# Altium PCB GPSDO_V2.0.PcbDoc (part 1 of 3)
Units mil, origin at the board's own origin, x right, y up, seen from the top; angles counter-clockwise.
Board outline 3461 x 3930 mil, 2 copper layers (Top Layer, Bottom Layer); 97 components, 56 nets, 415 pads, 225 vias.
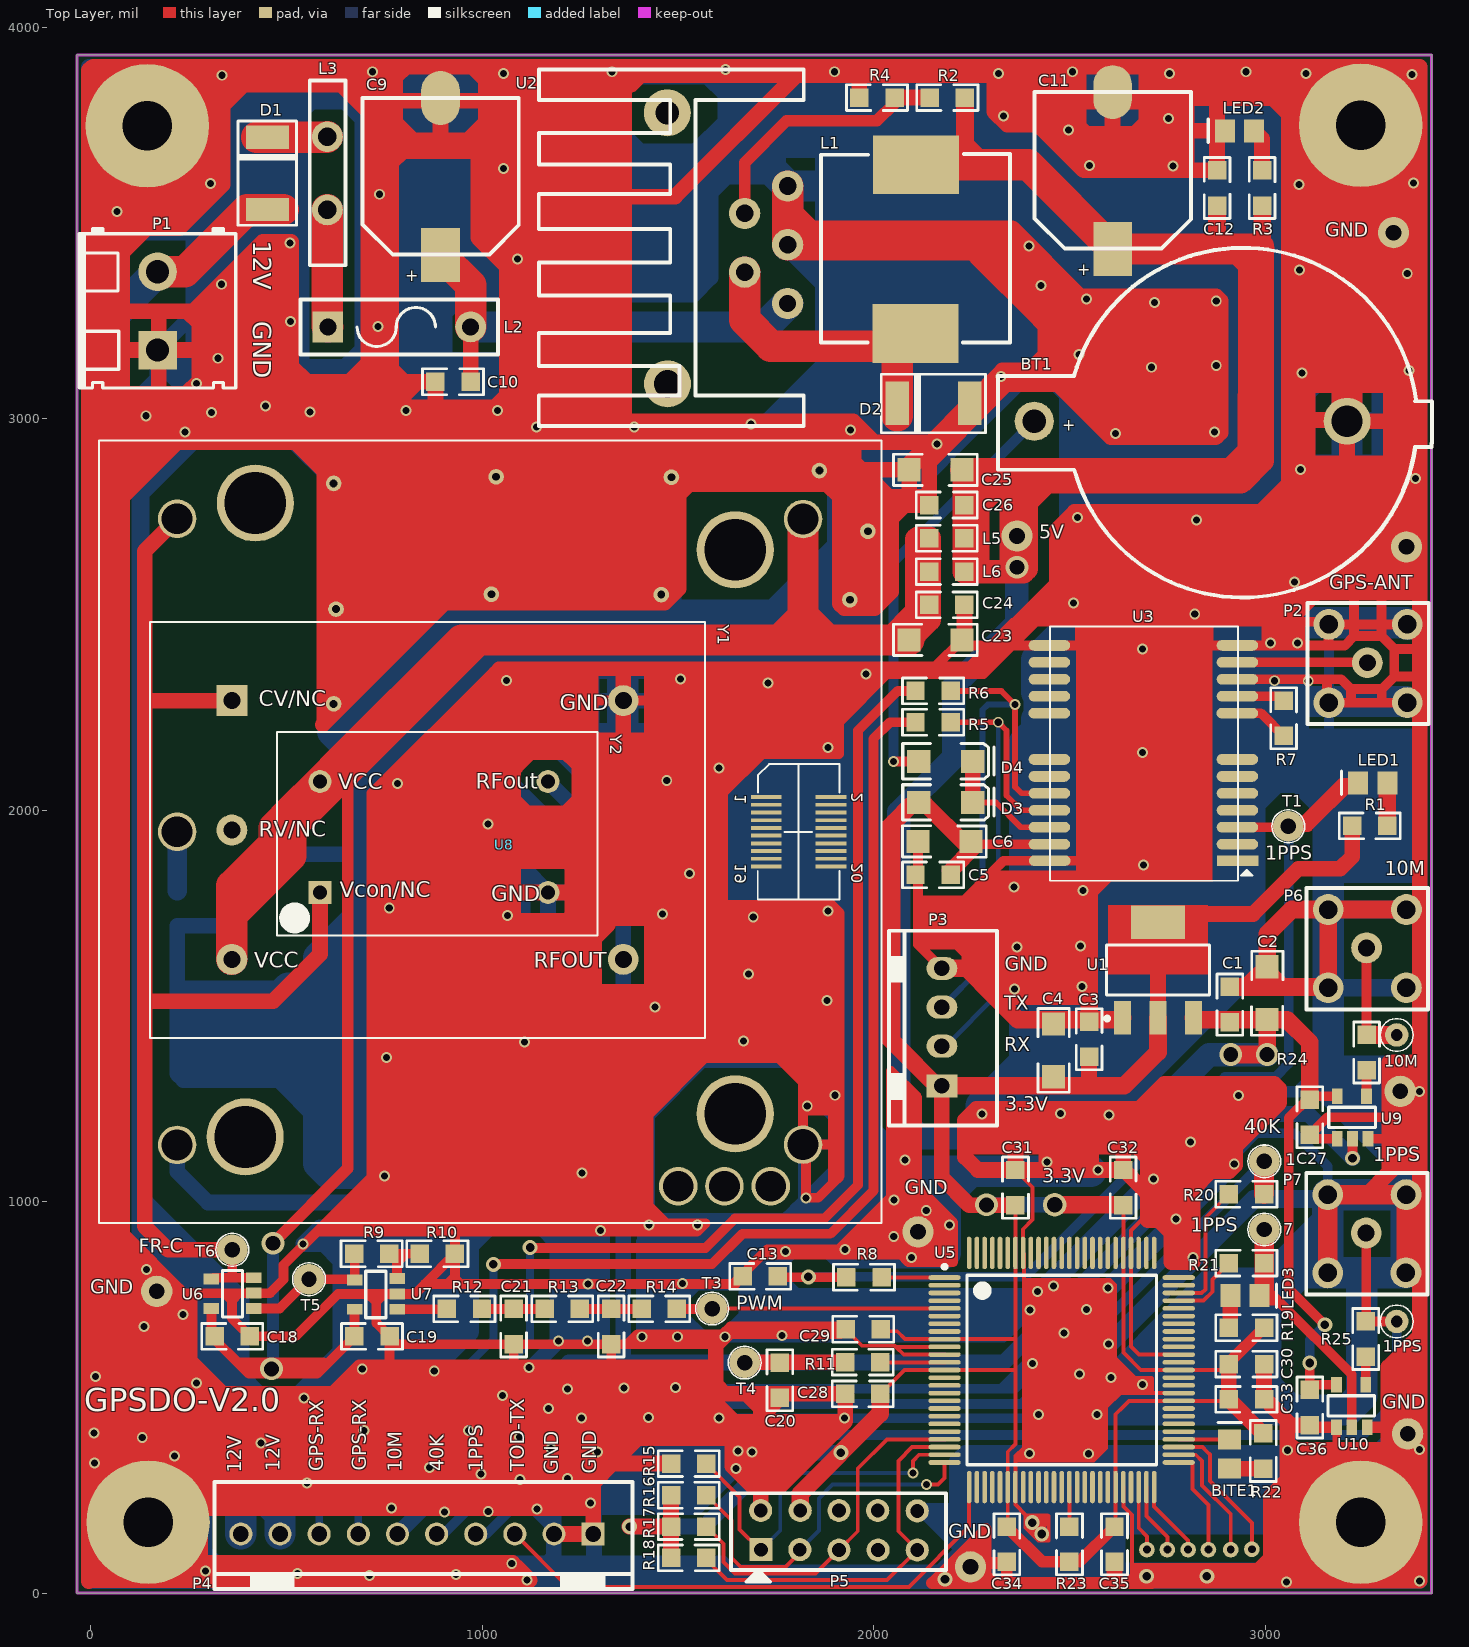
[diagram p0: Top Layer view]
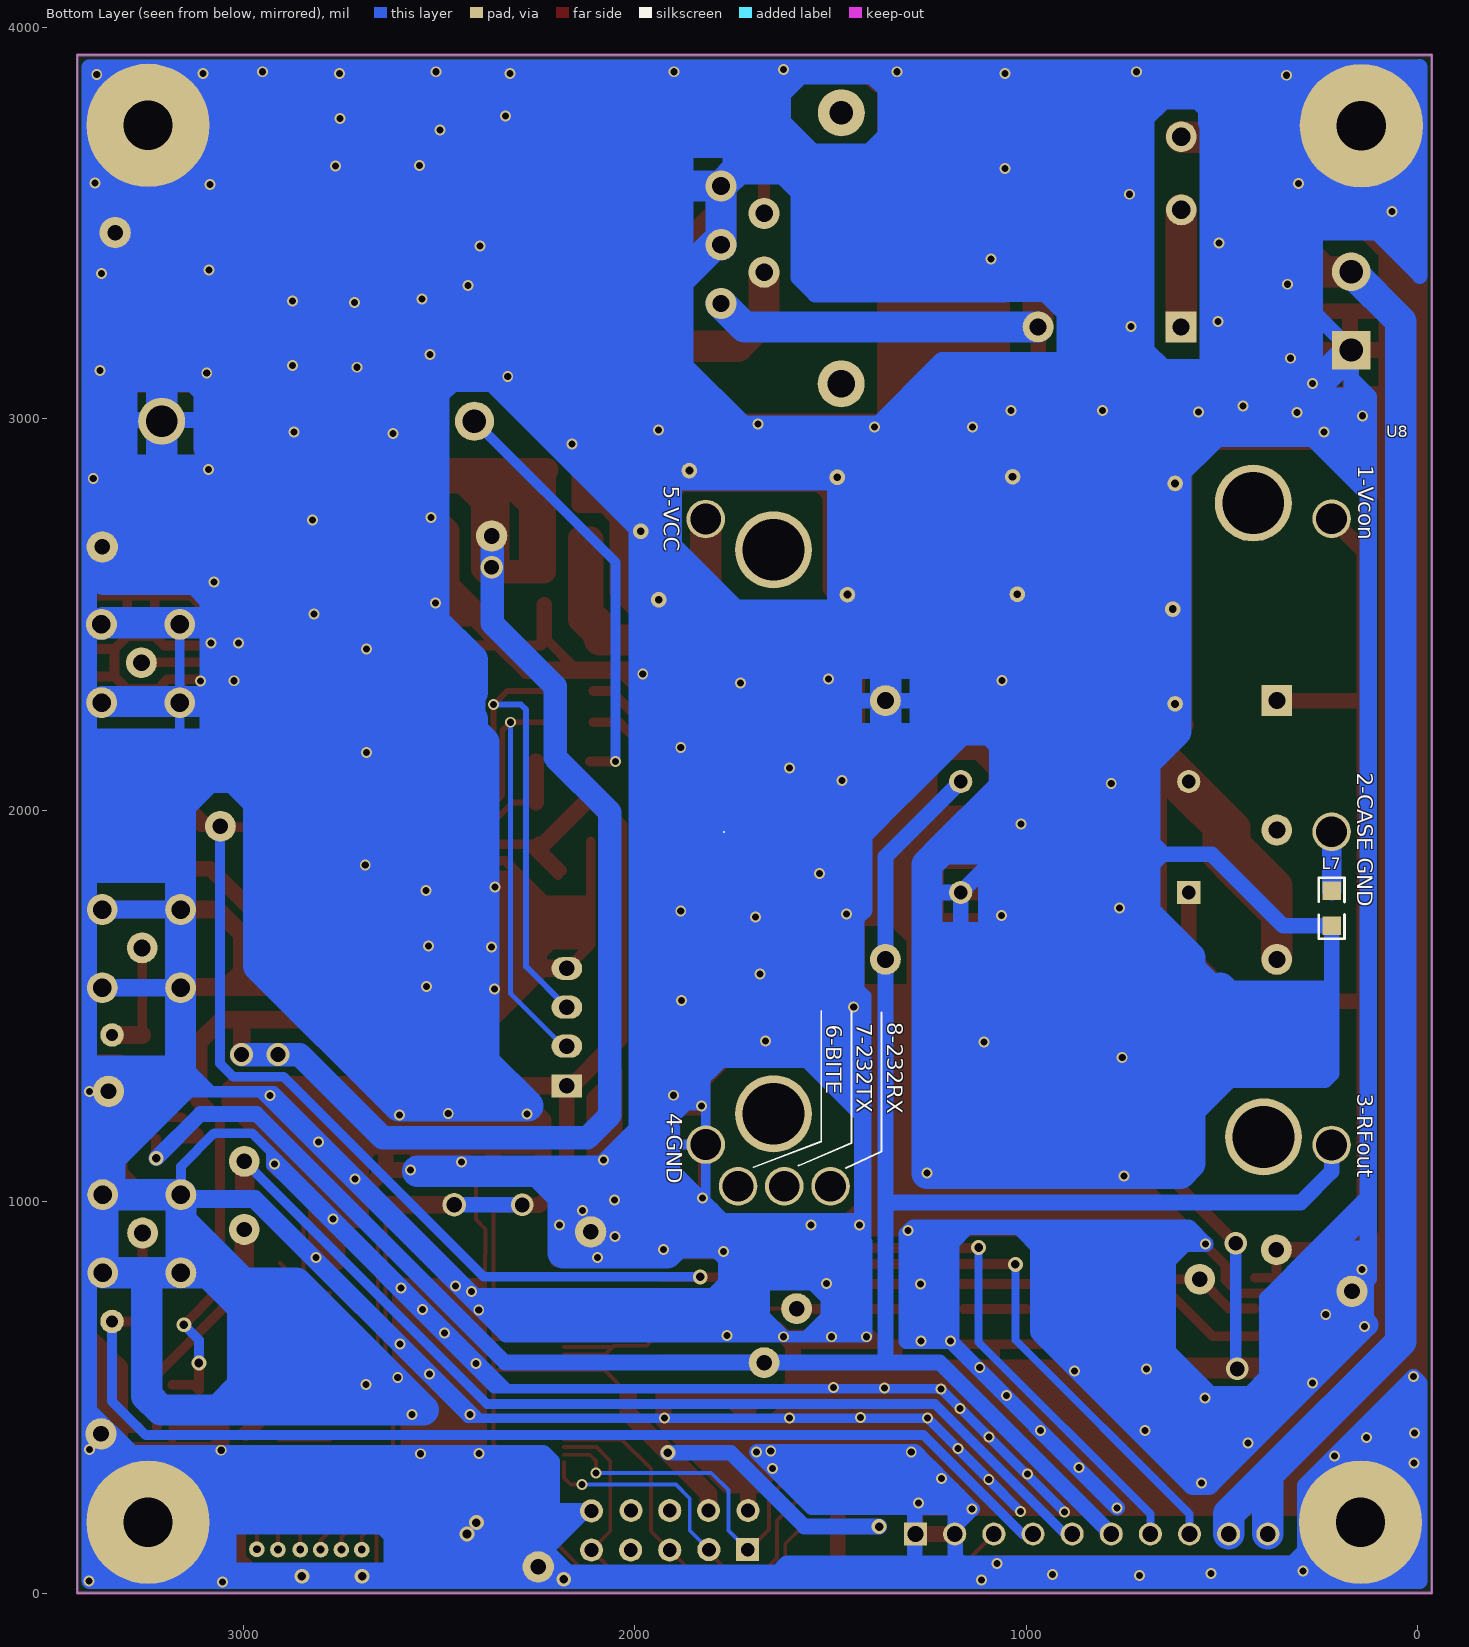
[diagram p1: Bottom Layer view, seen from below]

## Layer stack, top to bottom
Top Solder: solder mask 0.4, Solder Resist, Dk 3.5
Top Layer: signal copper 1.4
Dielectric 1: dielectric 12.6, FR-4, Dk 4.8
Bottom Layer: signal copper 1.4
Bottom Solder: solder mask 0.4, Solder Resist, Dk 3.5

## Board outline
-36,3930 3425,3930 3425,0 -36,0

## Design rules (kind name [scope] priority, off if disabled: settings)
Clearance [All] p1: gap=7
ComponentClearance [All] p1 off: gap=10 collisioncheckmode=3 verticalgap=10 showdistances=FALSE
PolygonConnect [All] p1: connectstyle=Relief reliefconductorwidth=10 reliefentries=4 polygonreliefangle="90 Angle" airgapwidth=10
RoutingVias [All] p1: holewidth=28 width=50 viastyle="Through Hole" minholewidth=28 minwidth=50 maxholewidth=28 maxwidth=50
SilkToBoardRegionClearance [All] p1 off:
SilkToSilkClearance [All] p1 off: silktosilkclearance=10
SilkToSolderMaskClearance [IsPad] p1 off: minsilkscreentomaskgap=10 clearancetoexposedcopper=TRUE
SolderMaskExpansion [All] p1: expansion=4
Width [All] p1: maxlimit=100 minlimit=10 preferedwidth=10 minimp=50.000000 maximp=50.000000 favimp=50.000000
26 further rules are at their usual default settings.

## Components (designator, comment, footprint, x,y, rotation, side; value= is the part's Value field where it differs from the comment)
1 "TEST" 测试点（圆形）#1 2998,1103 r90 top
1PPS "TEST" 测试点（圆形）#2 3336,694 r0 top
7 "TEST" 测试点（圆形）#1 2998,929 r90 top
10M "TEST" 测试点（圆形）#2 3336,1426 r0 top
BITE1 "红色" LED0805 2909,318 r90 top
BT1 "电池座 小" "电池座 2032  直插" 2410,2995 r90 top locked
C1 "0.1uF" 0805 2910,1548.6 r270 top
C2 "10uF" 1206 3005,1600 r270 top
C3 "0.1uF" 0805 2550,1460 r270 top
C4 "10uF" 1206 2459,1454 r270 top
C5 "0.1uF" 0805 2106.56,1835 r0 top
C6 "10uF" 1206 2113.16,1920 r0 top
C9 "470u/35v" "电容 铝电解 470U/35V" 893,3420 r0 top
C10 "0.1uF/50v" 0805 880,3095 r0 top
C11 "470u/35v" "电容 铝电解 470U/35V" 2610,3435 r0 top
C12 "104" 0805 2877,3545 r90 top
C13 "10pF" 0805 1665,809 r0 top
C18 "0.1uF" 0805 316,656 r0 top
C19 "0.1uF" 0805 673,656 r0 top
C20 "20pF" 0805 1760,589 r270 top
C21 "0.1uF" 0805 1080,636 r90 top
C22 "0.1uF" 0805 1329,636 r90 top
C23 "100u/25V" 1206 2090.19,2435 r0 top
C24 "0.1uF" 0805 2231.6,2525 r180 top
C25 "100u/25V" 1206 2225,2870 r180 top
C26 "0.1uF" 0805 2141.6,2780 r0 top
C27 "0.1uF" 0805 3114,1261 r270 top
C28 "0.1uF" 0805 1927,509 r0 top
C29 "0.1uF" 0805 1928,674 r0 top
C30 "0.1uF" 0805 2997,585 r180 top
C31 "0.1uF" 0805 2362,1081 r270 top
C32 "0.1uF" 0805 2637,1081 r270 top
C33 "0.1uF" 0805 2997,495 r180 top
C34 "0.1uF" 0805 2340,80 r90 top
C35 "0.1uF" 0805 2615,80 r90 top
C36 "0.1uF" 0805 3114,519 r270 top
D1 "1N5822" "二极管 贴片 4007" 451,3535 r90 top
D2 "1N5822" "二极管 贴片 4007" 2245,3040 r180 top
D3 "1N5819" "二极管 贴片 IN4148" 2115,2020 r0 top
D4 "1N5819" "二极管 贴片 IN4148" 2115,2125 r0 top
L1 "100uH/3A" "电感 贴片 12*12" 2108,3220 r90 top
L2 "磁珠" "磁珠 直插" 605,3235 r0 top
L3 "30V  3A" "30V/4A 自恢复保险" 565,3865 r270 top
L5 "磁珠" 0805 2141.6,2695 r0 top
L6 "磁珠" 0805 2141.6,2610 r0 top
L7 "磁珠" 0805 220,1705 r90 bottom
LED1 "绿色" LED0805 3312,2070 r180 top
LED2 "红色" Led0805 2972,3736 r180 top
LED3 "红色" LED0805 2911,760 r0 top
P1 "HT5.08-2" KF128L-5.08-2P 170,3376 r270 top
P2 "SMA" "天线座 50ohm 直立" 3261,2377 r0 top
P3 "XH2.54-4" VH2.54_4 2174,1296 r270 top
P4 "XH2.54-10" VH2.54_10 1283,151 r0 top
P5 "DC3压线座" "双排插针 2.54 2*5" 1711,111 r90 top
P6 "SMA" "天线座 50ohm 直立" 3259,1648.5 r0 top
P7 "SMA" "天线座 50ohm 直立" 3258,920 r0 top
R1 "1K" 0805 3222,1960 r0 top
R2 "30k" 0805 2143,3821 r0 top
R3 "2K" 0805 2992,3545 r90 top
R4 "10K" 0805 1963,3821 r0 top
R5 "0" 0805 2106.56,2225 r0 top
R6 "0" 0805 2106.56,2305 r0 top
R7 "0" 0805 3047,2190 r90 top
R8 "10R" 0805 2020,807 r180 top
R9 "510" 0805 762,867 r180 top
R10 "1k" 0805 930,867 r180 top
R11 "10R" 0805 2017,590 r180 top
R12 "510" 0805 999,726 r180 top
R13 "10k" 0805 1249,726 r180 top
R14 "10k" 0805 1497,726 r180 top
R15 "1k" 0805 1482,331 r0 top
R16 "10k" 0805 1572,250 r180 top
R17 "10k" 0805 1572,170 r180 top
R18 "10k" 0805 1572,90 r180 top
R19 "1k" 0805 2997,678 r180 top
R20 "10" 0805 2997,1019 r180 top
R21 "10" 0805 2997,843 r180 top
R22 "1k" 0805 2995,318 r90 top
R23 "10K" 0805 2500,170 r270 top
R24 "49.9" 0805 3259,1336 r90 top
R25 "49.9" 0805 3257,604 r90 top
T1 "TEST" 测试点（圆形）#1 3059,1959 r0 top
T3 "TEST" 测试点（圆形）#1 1587,727 r0 top
T4 "TEST" 测试点（圆形）#1 1670,589 r0 top
T5 "TEST" 测试点（圆形）#1 557,802 r0 top
T6 "TEST" 测试点（圆形）#1 361,877 r0 top
U1 "SPX1117M3-3.3" SOT223 2635,1470 r0 top
U2 "LM2576T-ADJ" "TO220 LM2576-YA30" 1780,3295 r90 top
U3 "N303-3" "模块 N303-3" 2930,1820 r90 top
U5 "EPM240T100C5N" TQFP100 2480,570 r0 top
U6 "LMV321" SOT23-5 416,727 r180 top
U7 "LMV321" SOT23-5 782,725 r180 top
U8 "SA.53m(国产铷钟HXTF1031H)" "模块 SA.53m" 2020,2945 r270 bottom
U9 "NC7SZ125" SOT23-5 3184,1161 r90 top
U10 "NC7SZ125" SOT23-5 3182,424 r90 top
Y1 "VCOCXO36-5V-10M" "模块 VCOCXO36-12V-10M" 360,2300 r0 top
Y2 "VCTCXO-5V-10M" "模块 VCTCXO-5V-10M" 585,1790 r0 top

## Footprints (in the part's own frame and the unit in brackets; to place one, negate y for a bottom-side part, rotate by r counter-clockwise, add the part's x,y. Pads: shape width x height; smd on the part's side, far side on the other; paste and mask are expansions set on the pad)
"30V/4A 自恢复保险" [mm] "Resistor; 2 Leads"
  round 2 hole 1.2: 1(3.658,0.991) 2(8.407,0.991)
  silkscreen extent 0,-0.15 12,2.16
0805 [mm]
  rect 1.2x1.2 smd: 1(0,0) 2(2.286,0)
  silkscreen extent -0.84,-0.84 3.12,0.84
1206 [mm]
  rect 1.5x1.5 smd: 1(-0.005,0) 2(3.424,0)
  silkscreen extent -1.01,-1.01 4.43,1.02
KF128L-5.08-2P [mm]
  rect 2.5x2.5 hole 1.5: 1(5.08,0)
  round 2.5 hole 1.5: 2(0,0)
  silkscreen extent -2.79,-5.08 7.54,5.08
LED0805 [mm] "Chip Capacitor; Body 2.0 x 1.2 mm (LxW typ)"
  rect 1.3x1.5 smd: 1(0,0) 2(1.9,0)
  silkscreen extent 2.98,-0.76 2.98,0.76
Led0805 [mm] "Chip Capacitor; Body 2.0 x 1.2 mm (LxW typ)"
  rect 1.3x1.5 smd: 1(0,0) 2(1.9,0)
  silkscreen extent 2.98,-0.76 2.98,0.76
SOT23-5 [mm]
  rect 1x0.7 smd: 1(0,0) 2(-0.002,-1) 3(-0.001,-2) 4(2.753,-1.91) 5(2.754,0)
  silkscreen extent 0.73,-2.48 2.04,0.55
SOT223 [mm] "SOT-223/SC-73; 4 Leads; Body 6.7 x 7.3 mm, inc. leads (LxW max)"
  rect 1.1x2.15 smd: 1(0.011,-0.001) 2(2.311,-0.001) 3(4.611,-0.001)
  rect 3.5x2.15 smd: 4(2.311,6.199)
  silkscreen extent -1.11,-0.18 5.66,4.72
"TO220 LM2576-YA30" [mil]
  round 80 hole 43.31: 1(0,0)
  round 80 hole 45: 2(80.01,109.98) 3(150.01,-0.02) 4(230.01,109.98) 5(300.01,-0.02)
  round 120 hole 70: ""(-205.51,306.97)
  round 120 hole 60: ""(487.02,307.5)
  silkscreen extent -314,-41 598,636
TQFP100 [mm] "Thin QFP, 100-Leads, Body 14x14mm, Pitch 0.5mm, IPC Low Density"
  oval 2.1x0.3 smd: 1(-7.6,6) 2(-7.6,5.5) 3(-7.6,5) 4(-7.6,4.5) 5(-7.6,4) 6(-7.6,3.5) 7(-7.6,3) 8(-7.6,2.5) 9(-7.6,2) 10(-7.6,1.5) 11(-7.6,1) 12(-7.6,0.5) 13(-7.6,0) 14(-7.6,-0.5) 15(-7.6,-1) 16(-7.6,-1.5) 17(-7.6,-2) 18(-7.6,-2.5) 19(-7.6,-3) 20(-7.6,-3.5) 21(-7.6,-4) 22(-7.6,-4.5) 23(-7.6,-5) 24(-7.6,-5.5) 25(-7.6,-6) 51(7.6,-6) 52(7.6,-5.5) 53(7.6,-5) 54(7.6,-4.5) 55(7.6,-4) 56(7.6,-3.5) 57(7.6,-3) 58(7.6,-2.5) 59(7.6,-2) 60(7.6,-1.5) 61(7.6,-1) 62(7.6,-0.5) 63(7.6,0) 64(7.6,0.5) 65(7.6,1) 66(7.6,1.5) 67(7.6,2) 68(7.6,2.5) 69(7.6,3) 70(7.6,3.5) 71(7.6,4) 72(7.6,4.5) 73(7.6,5) 74(7.6,5.5) 75(7.6,6)
  oval 0.3x2.1 smd: 26(-6,-7.6) 27(-5.5,-7.6) 28(-5,-7.6) 29(-4.5,-7.6) 30(-4,-7.6) 31(-3.5,-7.6) 32(-3,-7.6) 33(-2.5,-7.6) 34(-2,-7.6) 35(-1.5,-7.6) 36(-1,-7.6) 37(-0.5,-7.6) 38(0,-7.6) 39(0.5,-7.6) 40(1,-7.6) 41(1.5,-7.6) 42(2,-7.6) 43(2.5,-7.6) 44(3,-7.6) 45(3.5,-7.6) 46(4,-7.6) 47(4.5,-7.6) 48(5,-7.6) 49(5.5,-7.6) 50(6,-7.6) 76(6,7.6) 77(5.5,7.6) 78(5,7.6) 79(4.5,7.6) 80(4,7.6) 81(3.5,7.6) 82(3,7.6) 83(2.5,7.6) 84(2,7.6) 85(1.5,7.6) 86(1,7.6) 87(0.5,7.6) 88(0,7.6) 89(-0.5,7.6) 90(-1,7.6) 91(-1.5,7.6) 92(-2,7.6) 93(-2.5,7.6) 94(-3,7.6) 95(-3.5,7.6) 96(-4,7.6) 97(-4.5,7.6) 98(-5,7.6) 99(-5.5,7.6) 100(-6,7.6)
  silkscreen extent -7.72,-6.15 6.15,6.82
VH2.54_4 [mm]
  rect 1.5x2 hole 1.016: 1(0,0)
  oval 1.5x2 hole 1.016: 2(-2.58,0) 3(-5.105,0)
  oval 1.5x2 hole 1: 4(-7.62,0)
  silkscreen extent -10.06,-3.43 2.56,3.58
VH2.54_10 [mm]
  rect 1.5x1.5 hole 1.016: 1(0,0)
  round 1.5 hole 1.016: 2(-2.54,0) 3(-5.08,0) 4(-7.62,0) 5(-10.16,0) 6(-12.7,0) 7(-15.24,0) 8(-17.78,0) 9(-20.32,0) 10(-22.86,0)
  silkscreen extent -24.57,-3.58 2.56,3.38
"二极管 贴片 4007" [mil]
  rect 60x110 smd: 1(0,0) 2(185,0)
  silkscreen extent -40,-74 226,75
"二极管 贴片 IN4148" [mm] "SMT LED; 2 Flat Leads"
  rect 1.5x1.5 smd: 1(0,0) 2(3.5,0)
  silkscreen extent -1.04,-1.15 4.88,1.15
"双排插针 2.54 2*5" [mm]
  rect 1.5x1.5 hole 0.889: 1(0,-0.025)
  round 1.5 hole 0.889: 2(2.54,0) 3(0,-2.54) 4(2.54,-2.565) 5(-0.025,-5.08) 6(2.54,-5.08) 7(-0.025,-7.62) 8(2.54,-7.595) 9(-0.025,-10.16) 10(2.515,-10.16)
  silkscreen extent -2.08,-12.04 3.66,1.93
"天线座 50ohm 直立" [mm]
  round 2 hole 1.1: 1(0,0)
  round 2 hole 1.2: 2(-2.49,-2.59) 2(-2.49,2.49) 2(2.584,-2.584) 2(2.59,2.49)
  silkscreen extent -3.89,-3.99 3.99,3.89
"模块 N303-3" [mm]
  rect 0.7x2.7 smd: 1(1.3,0.005)
  oval 0.7x2.7 smd: 2(2.375,0.025) 3(3.475,0.025) 4(4.575,0.025) 5(5.675,0.025) 6(6.775,0.025) 7(7.875,0.025) 8(10.875,0.029) 9(11.975,0.025) 10(13.075,0.025) 11(14.175,0.025) 12(15.275,0.025) 13(15.275,12.225) 14(14.175,12.225) 15(13.075,12.225) 16(11.975,12.225) 17(10.875,12.229) 18(7.875,12.225) 19(6.775,12.225) 20(5.675,12.225) 21(4.575,12.225) 22(3.475,12.225) 23(2.375,12.225) 24(1.3,12.205)
  silkscreen extent 0,-0.97 16.5,12.2
"模块 SA.53m" [mm]
  round 2.5 hole 2: 1(5.08,45.72) 2(25.4,45.72) 3(45.72,45.72) 4(45.7,5.1) 5(5.1,5.1) 6(48.4,7.2) 7(48.4,10.2) 8(48.4,13.2)
  rect 0.25x2 smd far side: J1-1(23.147,7.488) J1-2(23.139,3.287) J1-3(23.647,7.488) J1-4(23.647,3.287) J1-5(24.147,7.488) J1-6(24.147,3.287) J1-7(24.647,7.488) J1-8(24.647,3.287) J1-9(25.147,7.488) J1-10(25.147,3.287) J1-11(25.647,7.488) J1-12(25.647,3.287) J1-13(26.147,7.488) J1-14(26.147,3.287) J1-15(26.647,7.488) J1-16(26.647,3.287) J1-17(27.147,7.488) J1-18(27.147,3.287) J1-19(27.647,7.488) J1-20(27.647,3.287)
  round 5 hole 4: ""(4.064,40.64) ""(7.1,9.5) ""(43.7,9.5) ""(45.2,41.3)
  silkscreen extent 25.4,6.3 47.22,16.51
"模块 VCOCXO36-12V-10M" [mm]
  rect 2x2 hole 1.1: 1(0,-0.5)
  round 2 hole 1.1: 2(0,-8.9) 3(0,-17.3) 4(25.4,-17.3) 5(25.4,-0.5)
  silkscreen extent -5.3,-22.39 30.7,4.61
"模块 VCTCXO-5V-10M" [mm]
  rect 1.5x1.5 hole 0.9: 1(0,0)
  round 1.5 hole 0.9: 2(0,7.2) 3(14.8,7.2) 4(14.8,0)
  silkscreen extent -2.78,-2.79 18.02,10.41
测试点（圆形）#1 [mm]
  round 2 hole 1: 1(0,0)
  silkscreen extent -1.06,-1.07 1.06,1.07
测试点（圆形）#2 [mm]
  round 1.524 hole 0.762: 1(0,0)
  silkscreen extent -1.07,-1.06 1.07,1.06
"电容 铝电解 470U/35V" [mm]
  rect 2.5x3.5 smd: 1(0,-0.025)
  oval 2.5x3.5 smd: 2(0,10.16)
  silkscreen extent -5.05,0 5.08,10.16
"电感 贴片 12*12" [mil]
  rect 150x220 smd: 1(-2,1) 2(429,0)
  silkscreen extent -25,-240 457,243
"电池座 2032  直插" [mil]
  round 100 hole 60: 1(-1,0)
  round 120 hole 80: 2(-1,-799.21)
  silkscreen extent -451,-1016 442,93
"磁珠 直插" [mm]
  rect 2x2 hole 1.1: 1(0,0)
  round 2 hole 1.1: 2(9.271,0)
  silkscreen extent -1.78,-1.78 11.05,1.78

## Part data
1 1PPS 7 10M T1 T3 T4 T5 T6: library part 测试点_小
BITE1 LED1 LED2 LED3: library part "贴片发光二极管 0805"
C1 C2 C3 C4 C5 C6 C10 C13 C18 C19 C20 C21 C22 C24 C26 C27 C28 C29 C30 C31 C32 C33 C34 C35 C36: library part "电容 贴片 0805"
C9: library part "电容 直插 电解  470u/35v"
C11: library part "电解电容 470u/35v"
C12: library part "贴片电容 0805"
C23 C25: library part "电容 贴片 铝电解 470u/25V"
D1 D2: library part "二极管 1N5822"
D3 D4: library part "二极管 贴片 1N4148"
L1: library part "电感 330uH/3A"
L3: library part "保险 自恢复"
P1: library part "连接件 HT5.08-2"
P2 P6 P7: library part "连接件 天线座 SMA"
P3: library part "联结件 XH2.54-4"
P4: library part "连接件 XH2.54-10"
P5: library part "联结件 DC3 2*5"
R1 R5 R6 R7 R8 R9 R10 R11 R12 R13 R14 R15 R16 R17 R18 R19 R20 R21 R22 R24 R25: library part "电阻 贴片 0805"
R2 R3 R4 R23: library part "贴片电阻 0805"
U1: library part "贴片芯片 SPX1117M3-3.3", "LDO"
U2: library part "贴片芯片 LM2575T-ADJ"
U3: library part "模块 N303-3"
U6 U7: library part "贴片芯片 LMV321"
U8: library part "模块 SA.53m"
U9 U10: library part "贴片芯片 NC7SZ125", "超高速缓冲"
Y1: library part "模块 恒温VCOCXO36-12V 10M"
Y2: library part "模块 VCTCXO-5V-10M"

## Free pads (board coordinates)
  round 40 hole 20: 0(620,2272) 0(620,2835) 0(626,2514) 0(1023,2552) 0(1035,2852) 0(1457,2551) 0(1483,2851) 0(1861,2868) 0(1939,2538) 0(1985,2713) 0(2698,111) 0(2750,111) 0(2803,111) 0(2855,111) 0(2912,111) 0(2966,112)
  round 80 hole 40: 1(168,771) 2(3364,407) 3(3345,1282) 4(3328,3476) 6(2113,923) 7(2247,67) 8(2366,2701) 10(3361,2673)
  round 60 hole 40: 9(2462,992)
  round 314.96 hole 125.98: ""(144,3749) ""(146,181) ""(3244,181) ""(3244,3750)

## Via types
v1: diameter 28, hole 18, Top Layer to Bottom Layer, 206 vias
v2: diameter 38, hole 22, Top Layer to Bottom Layer, 13 vias
v3: diameter 58, hole 38, Top Layer to Bottom Layer, 6 vias

## Nets (pads, with @x,y where several pads share a name; then routed paths per layer and width w, separated by ;. In a path a pad name is that pad's centre, name@x,y a point inside that pad or via, vN(x,y) a via of type N, cw(c..) or ccw(c..) an arc to the next point about the centre after c; other vN are vias at no path point)
1PPS_OUT: 1PPS.1 P4.4 P7.1 R25.2 | length 3016.8
  Top Layer w25: P7.1@3258,920 3258,695 R25.2@3257,694 1PPS.1@3336,694
  Bottom Layer w25: P4.4@997,151 P4.4@983,151 1010,151 1263,404 3250,404 3336,490 1PPS.1@3336,694
5V: C1.2 C2.2 C11.1 C12.1 C25.1 C26.2 C27.1 C36.1 L1.2 L5.2 L6.2 pad.8 R2.2 R3.1 U1.3 U9.5 U10.5 | length 9738.2
  Top Layer w25: v2(3114,588) C36.1@3114,519 3127.42,532.42 U10.5@3182,532.42 ; C27.1@3114,1261 C27.1@3122.42,1269.42 ; v2(3152.5,685.5) 3060,778 3060,1214 3114,1268 3115.42,1269.42 C27.1@3122.42,1269.42 ; U9.5@3184,1269.42 C27.1@3122.42,1269.42
  Top Layer w45: 2233,3743 2233,3702 ; R2.2@2233,3821 2233,3702 ; 2234,3649 2233,3650 2233,3702 ; 2286,3649 2233,3702 ; U1.3@2816.55,1469.95 2821.31,1465.2 C2.2@3005,1465.2 ; 2872,3434.02 2877,3439.02 C12.1@2877,3545 ; v3(2912,1376) v3(3005,1376) C2.2@3005,1465.2 ; 2983.98,3434.02 2992,3442.03 R3.1@2992,3545 ; C27.1@3114,1261 3114,1268 3114,1407 3055.8,1465.2 C2.2@3005,1465.2
  Top Layer w60: 2920,3434.02 2960.01,3394.01 ; 2992,3442.03 2992,3362.02 ; 2263,2610 L6.2@2231.6,2610 L5.2@2231.6,2695 C26.2@2231.6,2780 2231.6,2863.6 C25.1@2225.2,2870 2306,2870 ; 2263,2610 2266,2613 2266,2778 ; 2263,2610 v3@2351,2610 ; 2266,2778 2327,2839 ; 2266,2778 2266,2830 2306,2870 ; 2306,2870 2389,2870 ; 2327,2839 2389,2839 ; 2327,2839 2351,2815 v3@2351,2610 ; v3@2351,2610 2382,2610 2389,2617 2389,2788 ; 2389,2788 2440,2839 ; 2389,2788 2389,2839 ; 2389,2839 2389,2870 ; 2389,2839 2440,2839 ; 2389,2870 2911,2870 2959,2918 ; 2440,2839 2938,2839 2992,2893 2992,2951 ; 2959,2918 2959,3059 2960.01,3060.01 2960.01,3394.01 ; 2959,2918 2992,2951 ; 2960.01,3394.01 2992,3362.02 ; 2992,2951 2992,3362.02
  Top Layer w80: L1.2@2108,3649 2234,3649 2286,3649 2395.02,3649 C11.1@2610,3434.02 2872,3434.02 2920,3434.02 2983.98,3434.02
  Bottom Layer w25: v2(3114,588) 3114,647 v2(3152.5,685.5)
  Bottom Layer w60: pad.8@2365,2701 2365,2478 2204,2317 2204,2135 2064,1995 2064,1221 2122,1163 2644,1163 2857,1376 v3(2912,1376) v3(3005,1376)
  other v3: 2366,2621
10M_OUT: C20.1 P4.6 R11.2 T4.1 U8.3 U9.2 Y1.4 Y2.3 | length 6049
  Top Layer w25: v2(3223,1111) 3223.37,1111.37 U9.2@3223.37,1160.92
  Top Layer w40: T4.1@1670,589 1671,590 R11.2@1927,590
  Bottom Layer w40: U8.3@220,1145 220,1077 299,998 1360,998 ; P4.6@783,151 1221,589 1373,589 ; Y2.3@1167.68,2073.46 1360,1881.14 Y1.4@1360,1618.9 1360,998 ; v2(3223,1111) 3110,1224 2967,1224 2332,589 T4.1@1670,589 1373,589 ; 1360,998 1360,602 1373,589
12V: C9.1 C10.2 L2.2 U2.1 | length 1190.8
  Top Layer w40: C10.2@970,3095 L2.2@970,3235
  Top Layer w80: C9.1@893,3419.02 970,3342.02 L2.2@970,3235
  Bottom Layer w80: L2.2@970,3235 1720,3235 U2.1@1780,3295
40KHZ: 1.1 P4.5 R20.1 | length 2602.2
  Top Layer w50: R20.1@2997,1019 2997,1102 1.1@2998,1103
  Bottom Layer w25: P4.5@883,151 901,151 1233,483 2378,483 1.1@3004,1109
+3.3V: C3.2 C4.2 C5.2 C6.2 C28.2 C29.2 C30.2 C31.2 C32.2 C33.2 C34.2 C35.2 D3.1 P3.1 P5.4 pad.9 R1.1 R16.2 R17.2 R18.2 R19.1 R22.2 R23.2 U1.2 U1.4 U3.23 U5.9 U5.13 U5.31 U5.45 U5.59 U5.63 U5.80 U5.94 | length 10078.7
  Top Layer w10: C28.2@2017,509 2078,570 U5.13@2180.79,570 2360.89,570 2361.89,571 ; C29.2@2017,669 2060,669 2080.26,648.74 U5.9@2180.79,648.74 2361,648.74 ; C34.2@2340,170 2342.2,172.2 U5.31@2342.2,270.79 2342.2,361.2 2361.89,380.89 2361.89,571 ; C31.2@2362,991 2361.89,990.89 U5.94@2361.89,869.21 2361.89,571 ; C35.2@2615,170 2617.8,172.8 U5.45@2617.8,270.79 2617.8,457.06 2637.48,476.74 ; C32.2@2637,991 2637.48,990.52 U5.80@2637.48,869.21 2637.48,614.52 2682,570 U5.63@2779.21,570 2892,570 C30.2@2907,585 ; 2638.74,478 2637.48,476.74 ; C33.2@2907,495 2903.26,491.26 U5.59@2779.21,491.26 2652,491.26 2637.48,476.74
  Top Layer w25: 2060,1410 P3.1@2174,1296 ; 2060,1965 D3.1@2115,2020 ; P3.1@2149,1294 2031,1412 2031,1963 2045,1977 ; C5.2@2185.5,1846.5 2252.49,1913.49 C6.2@2254.48,1913.49 ; C5.2@2196.56,1835 C6.2@2275.05,1913.49 ; C6.2@2234,1901 D3.1@2115,2020 ; U3.23@2448.68,1913.49 C6.2@2275.05,1913.49 ; 2045,1951 2047,1953 2048,1953 2056,1961 2056,1414 2045,1425 2045,1951 ; 2045,1951 2045,1977 ; 2045,1977 2088,2020 D3.1@2115,2020 ; D3.1@2115,2020 2139,2020 2239,1920 C6.2@2247.96,1920 C6.2@2254.48,1913.49 ; C6.2@2254.48,1913.49 C6.2@2275.05,1913.49
  Top Layer w30: C34.2@2340,170 2430,80 R23.2@2500,80 2525,80 C35.2@2615,170 ; C30.2@2907,585 2907,588 R19.1@2997,678
  Top Layer w40: v2(1376,170) R17.2@1482,170 ; R18.2@1482,90 R17.2@1482,170 ; R16.2@1482,250 R17.2@1482,170 ; P3.1@2174,1296 2174,1061 2244.11,990.89 C31.2@2361.89,990.89 ; 2546,1296 2550,1300 C3.2@2550,1370 ; 2719.2,1599.8 2726,1593 ; U1.2@2726,1469.95 2726,1593 ; U1.4@2726,1714.05 2726,1593 ; 2816,1735 2969,1735 3085,1851 3192,1851 3222,1881 R1.1@3222,1960 ; C30.2@2907,585 C33.2@2907,495 R22.2@2994,408
  Top Layer w45: P5.4@1812,211 1812,254 2017,459 C28.2@2017,509 ; P3.1@2174,1296 2546,1296 2640,1296 2726,1382 U1.2@2726,1469.95 ; pad.9@2462,992 2636,992 C32.2@2637,991
  Bottom Layer w40: v2(1376,170) 1567,170 1756,359 v2(1916,359) ; v3(2288,992) pad.9@2462,992
CLK_1: R21.2 U5.72 | length 185.6
  Top Layer w10: U5.72@2779.21,747.17 2842.17,747.17 2865,770 2865,801 R21.2@2907,843
CLK_1K: U5.76
CLK_1M: U5.77
CLK_8: R20.2 U5.73 | length 339.4
  Top Layer w10: U5.73@2779.21,766.85 2837.81,766.85 2847,776.04 2847,959 R20.2@2907,1019
CLK_10: U5.74
CLK_10M: U5.78
CLK_100: U5.75
DC12V: D1.1 P1.2 P4.9 P4.10 | length 3998.7
  Top Layer w80: P1.2@170,3376 240,3376 399,3535 D1.1@491,3535
  Bottom Layer w80: P1.2@170,3376 43,3249 43,643 383,303 ; P4.10@383,151 383,303 ; P4.9@483,151 483,203 383,303
DIV_RST: R23.1 U5.39 | length 100.9
  Top Layer w10: U5.39@2499.68,270.79 2499.68,170.32 R23.1@2500,170
FRE.CONTROL: T6.1 U6.3 U6.4 U8.1 Y1.1 Y2.1 | length 3166.6
  Top Layer w25: U6.4@307.61,802.2 311.16,805.74 361,805.74 ; T6.1@361,891 361,805.74 ; U6.3@416.04,805.74 361,805.74
  Top Layer w40: U8.1@220,2745 137,2662 137,2284 ; Y1.1@360,2280.32 140.68,2280.32 137,2284 ; T6.1@361,877 197,877 137,937 137,1512 ; Y2.1@585,1790 585,1632 465,1512 137,1512 ; 137,1512 137,2284